# EAGLE board panel (EAGLE 9.6.2)
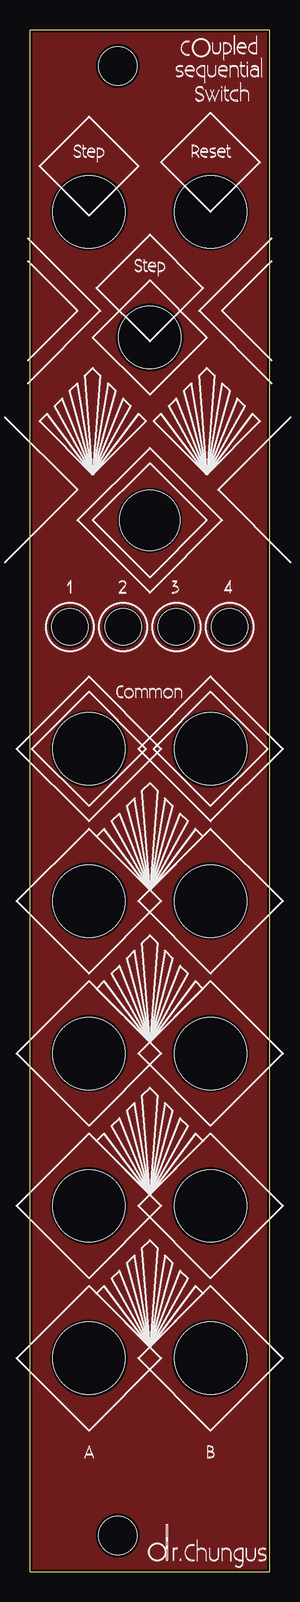
[diagram p0: board, top side]
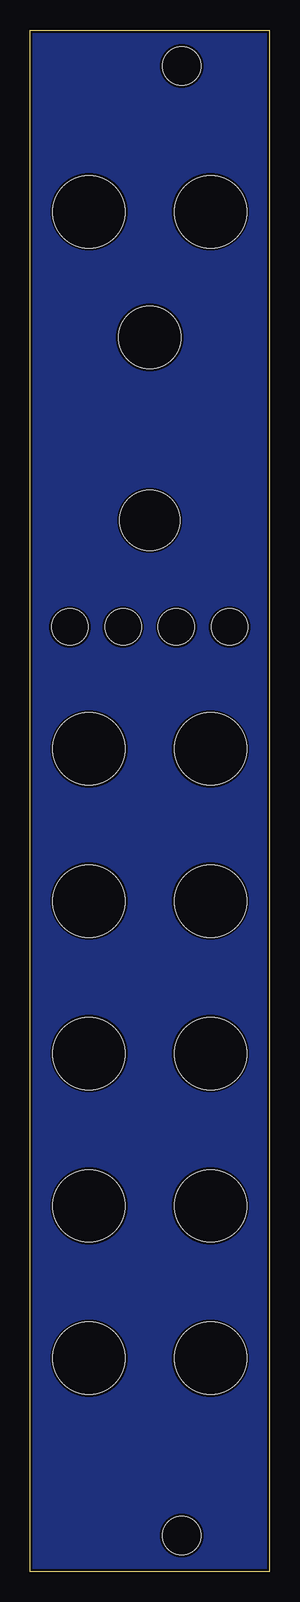
[diagram p1: board, bottom side, seen from below]

Size 20 x 128.5 mm. Coordinates in mm from the lower left corner, seen from the top.
Copper layers (1*16): Top 0.035mm / dielectric 1.6mm / Bottom 0.035mm
Design rules "jlcpcb-2layers": minimum track width 5mil, minimum drill 0.3mm, track to track 5mil, track to pad 5mil, pad to pad 5mil, via to via 5mil, smd to smd 5mil, copper to edge 0.2mm, drill to drill 6mil, minimum pad ring 10mil, minimum via ring 3mil, stop-mask expansion 4mil, vias tented up to drill 0mil, thermal gap 10mil
Net classes: 0 default: width 0.406 mm, clearance 0.102 mm
Holes 5 mm at 10,87.63
Holes 6.02 mm at 4.92,55.88 15.08,55.88 4.92,43.18 15.08,43.18 4.92,30.48 15.08,30.48 4.92,17.78 15.08,17.78 4.92,68.58 15.08,68.58 4.92,113.35 15.08,113.35
Holes 3.02 mm at 3.33,78.74 7.78,78.74 12.22,78.74 16.67,78.74
Holes 5.2 mm at 10,102.87

## Footprints (pad centres in the part's own frame; a part is rotated, then mirrored left to right if it is on the bottom)
EURO_PANEL_4HP = hole 3.2: 7.5,125.5; 7.5,3

## Placement (x,y rotation side)
U$2  [EURO_PANEL_4HP]  -0.16,0 0 top

## Library data of the parts
U$2 = eurohelper

## Tracks (layer width: path | path; a pad name or v marks a point on that pad's centre or on a via)
GND
  pour Top: -0.16,128.59 20.16,128.59 20.16,0 -0.16,0
  pour Bottom: -0.16,128.59 20.16,128.59 20.16,0 -0.16,0